# EAGLE board Layout (EAGLE 9.1.3)
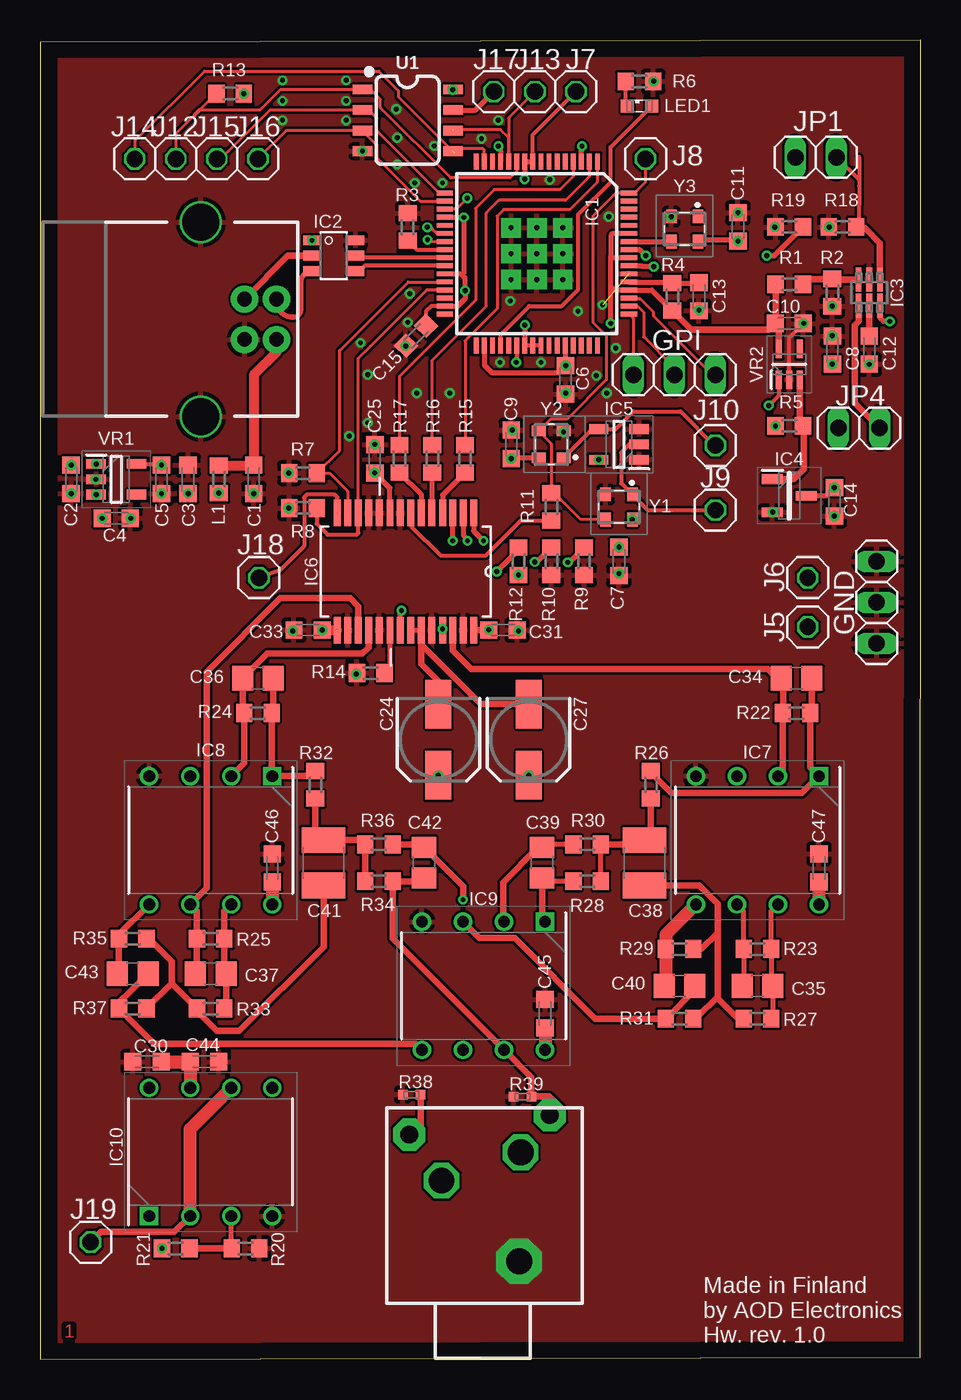
[diagram p0: board, top side]
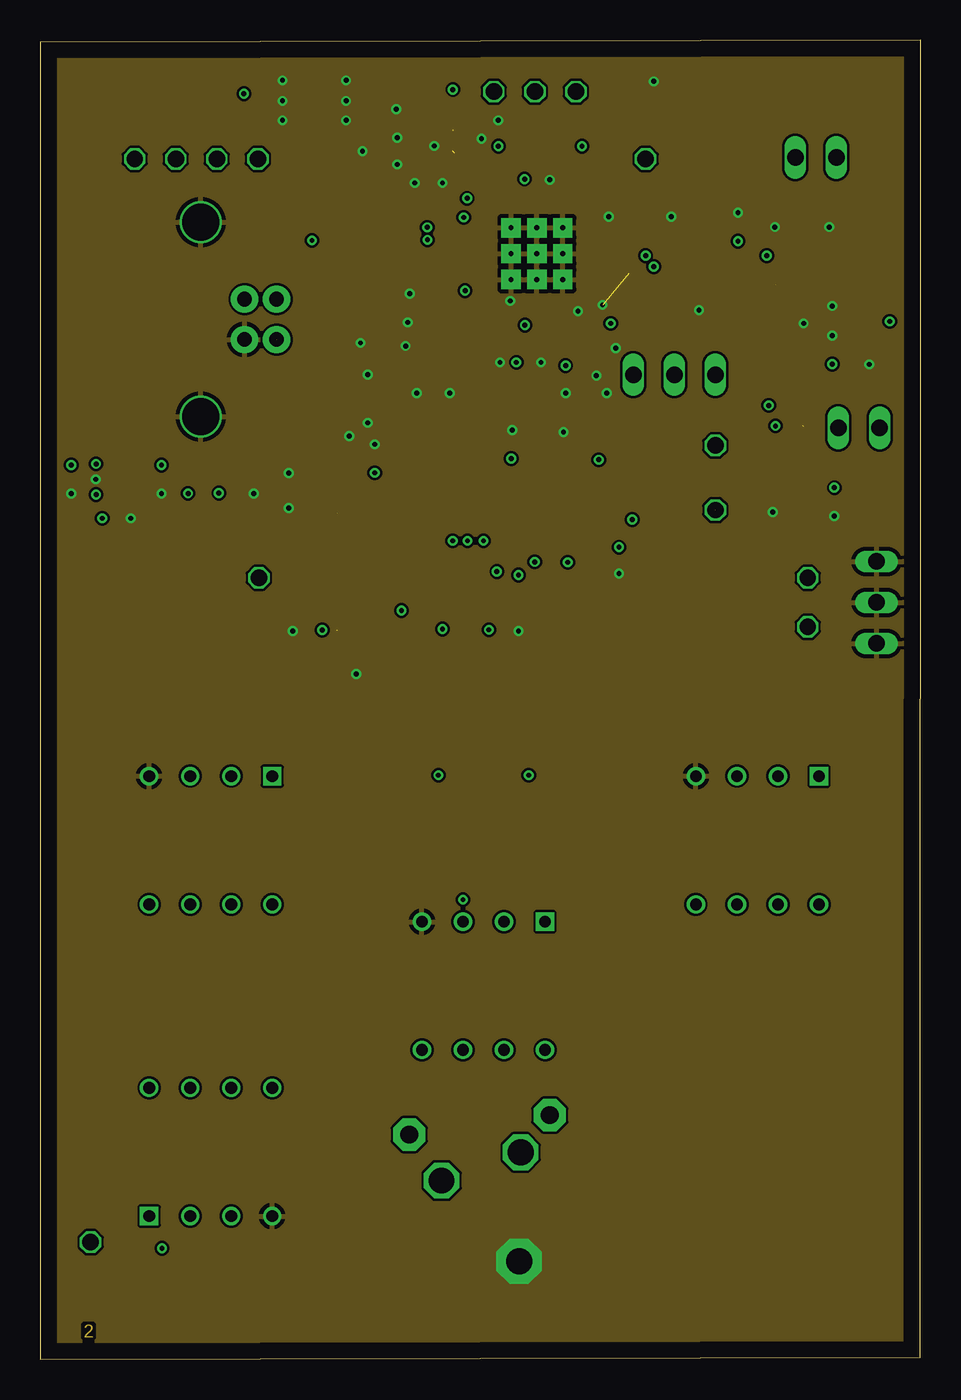
[diagram p1: board, inner layer Route2]
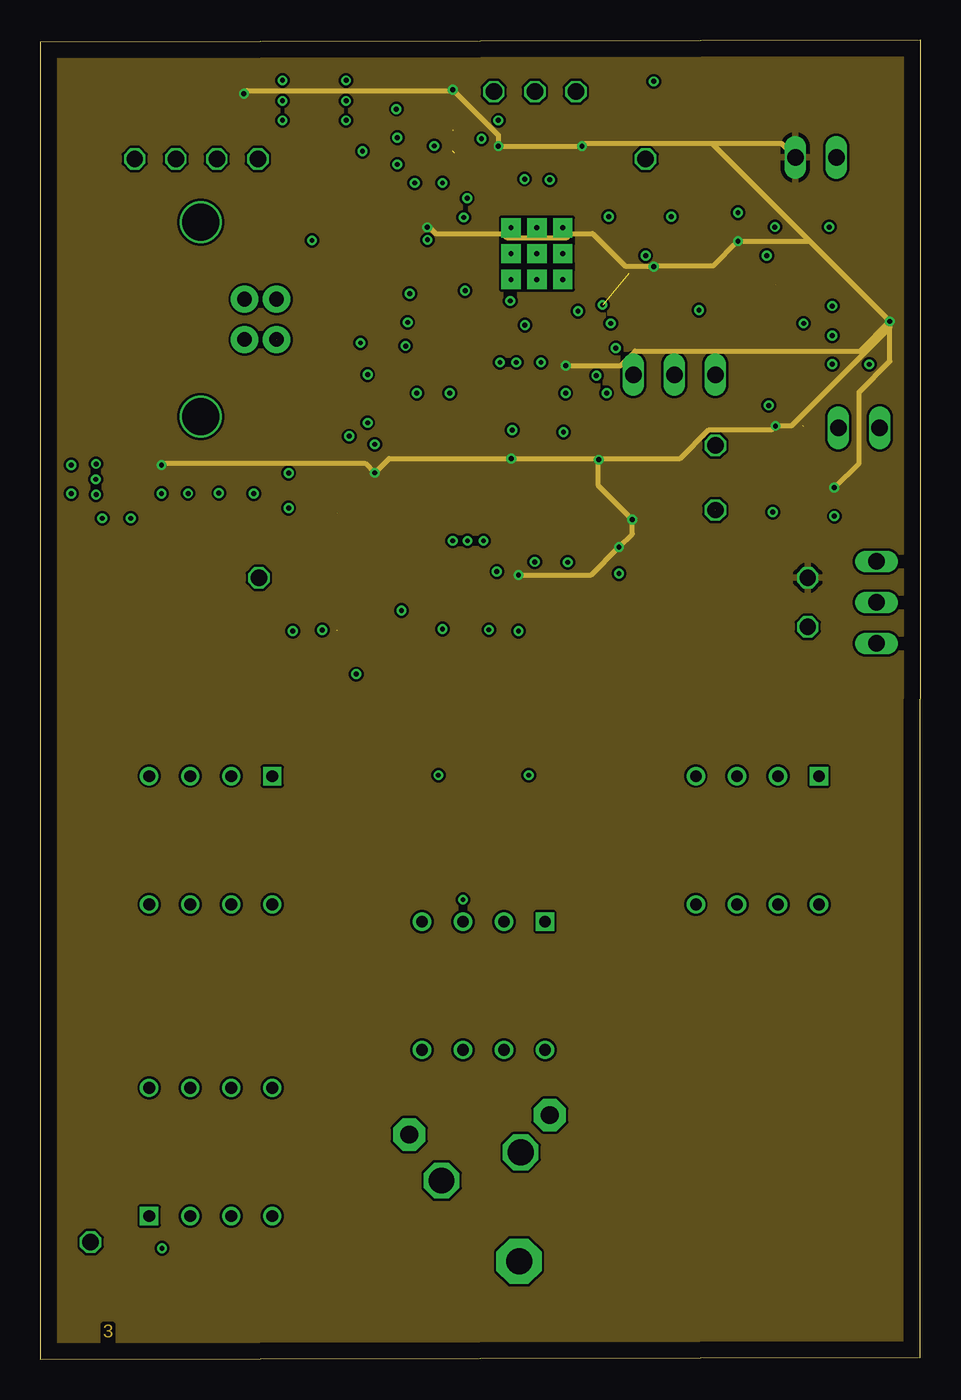
[diagram p2: board, inner layer Route15]
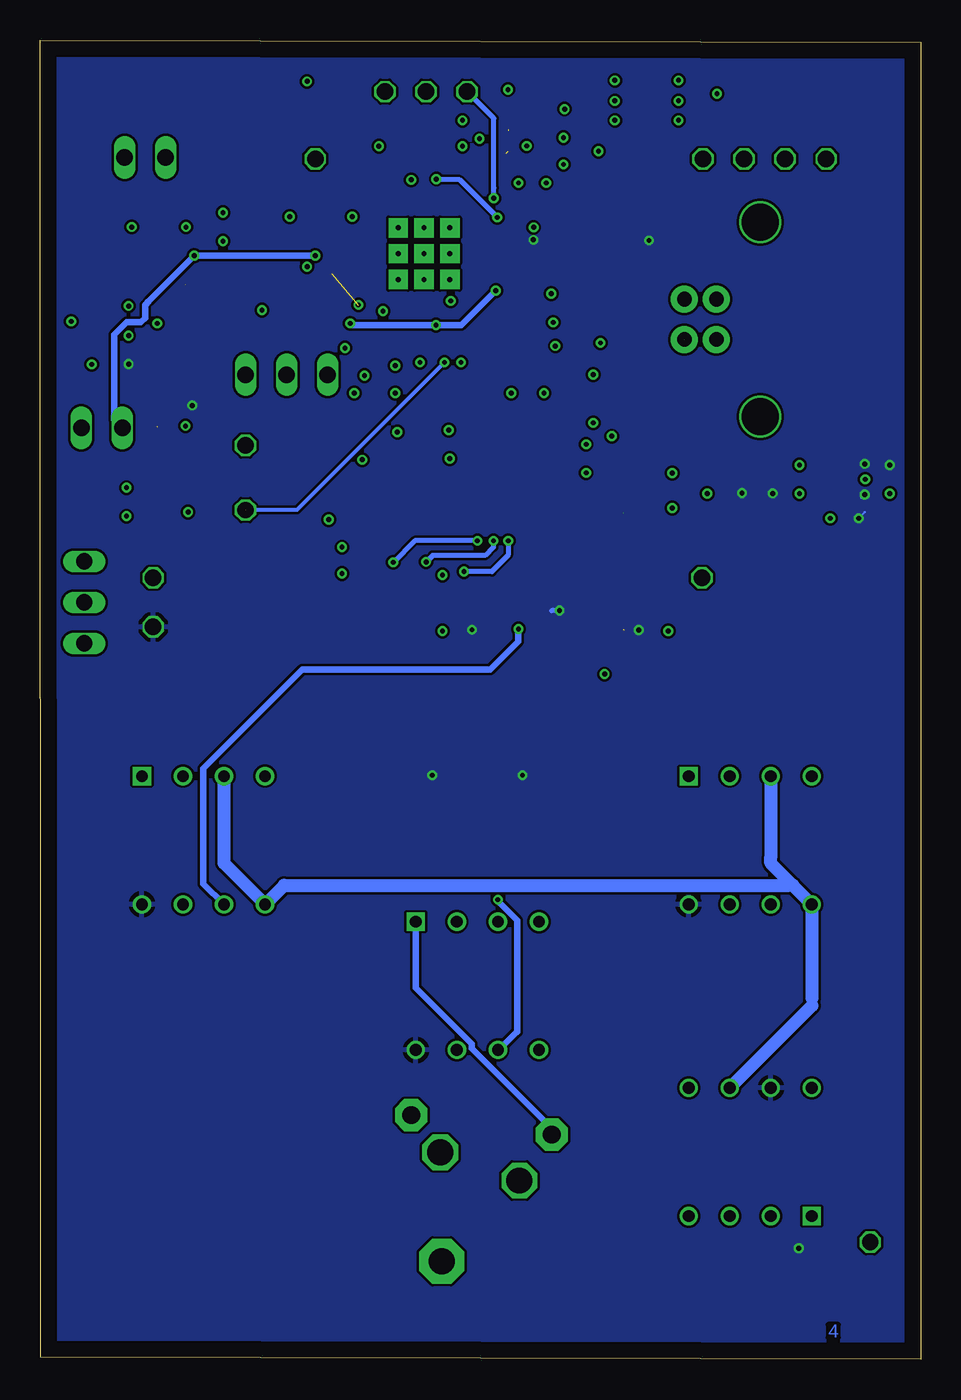
[diagram p3: board, bottom side, seen from below]

Size 54.48 x 81.66 mm. Coordinates in mm from the lower left corner, seen from the top.
Outline: 0,0 54.47,0.13 54.48,81.66 0,81.53 0,0
Copper layers (1+2*15+16): Top 0.035mm / dielectric 1.5mm / Route2 0.035mm / dielectric 0.15mm / Route15 0.035mm / dielectric 0.2mm / Bottom 0.035mm
Design rules "default *": minimum track width 6mil, minimum drill 0.2mm, track to track 6mil, track to pad 6mil, pad to pad 6mil, via to via 6mil, smd to smd 6mil, copper to edge 40mil, drill to drill 6mil, minimum pad ring 6mil, minimum via ring 6mil, stop-mask expansion 4mil, vias tented up to drill 20mil, thermal gap 10mil

## Footprints (pad centres in the part's own frame; a part is rotated, then mirrored left to right if it is on the bottom)
C0603K = smd 1.05 x 1.08: 1 -0.875,0; 2 0.875,0
SANYO-OSCON_SMD_B6 = smd 3 x 1.6: + 2.2,0; - -2.2,0
C0805 = smd 1.3 x 1.5: 1 -0.95,0; 2 0.95,0
C1210 = smd 1.6 x 2.7: 1 -1.4,0; 2 1.4,0
1X03 = drill 1.016 long: 1 -2.54,0; 2 0,0; 3 2.54,0
TQFP64 = smd 1 x 0.3: 1 -5.7,3.75; 2 -5.7,3.25; 3 -5.7,2.75; 4 -5.7,2.25; 5 -5.7,1.75; 6 -5.7,1.25; 7 -5.7,0.75; 8 -5.7,0.25; 9 -5.7,-0.25; 10 -5.7,-0.75; 11 -5.7,-1.25; 12 -5.7,-1.75; 13 -5.7,-2.25; 14 -5.7,-2.75; 15 -5.7,-3.25; 16 -5.7,-3.75; 33 5.7,-3.75; 34 5.7,-3.25; 35 5.7,-2.75; 36 5.7,-2.25; 37 5.7,-1.75; 38 5.7,-1.25; 39 5.7,-0.75; 40 5.7,-0.25; 41 5.7,0.25; 42 5.7,0.75; 43 5.7,1.25; 44 5.7,1.75; 45 5.7,2.25; 46 5.7,2.75; 47 5.7,3.25; 48 5.7,3.75 | smd 0.3 x 1: 17 -3.75,-5.7; 18 -3.25,-5.7; 19 -2.75,-5.7; 20 -2.25,-5.7; 21 -1.75,-5.7; 22 -1.25,-5.7; 23 -0.75,-5.7; 24 -0.25,-5.7; 25 0.25,-5.7; 26 0.75,-5.7; 27 1.25,-5.7; 28 1.75,-5.7; 29 2.25,-5.7; 30 2.75,-5.7; 31 3.25,-5.7; 32 3.75,-5.7; 49 3.75,5.7; 50 3.25,5.7; 51 2.75,5.7; 52 2.25,5.7; 53 1.75,5.7; 54 1.25,5.7; 55 0.75,5.7; 56 0.25,5.7; 57 -0.25,5.7; 58 -0.75,5.7; 59 -1.25,5.7; 60 -1.75,5.7; 61 -2.25,5.7; 62 -2.75,5.7; 63 -3.25,5.7; 64 -3.75,5.7 | drill 0.3 pad 1.2 square: GND1 -1.6,1.6; GND2 0,1.6; GND3 1.6,1.6; GND4 1.6,0; GND5 1.6,-1.6; GND6 0,-1.6; GND7 -1.6,-1.6; GND8 -1.6,0; GND9 0,0
SOT23-6 = smd 0.6 x 1.05: 1 -0.95,-1.35; 2 0,-1.35; 3 0.95,-1.35; 4 0.95,1.35; 5 0,1.35; 6 -0.95,1.35
SOT65P210X110-6N = smd 1.473 x 0.356: 1 -0.813,0.66; 2 -0.813,0; 3 -0.813,-0.66; 4 0.813,-0.66; 5 0.813,0; 6 0.813,0.66
SOT103P237X112-3N = smd 1.3 x 0.6: 1 -1.05,1.03; 2 -1.05,-1.03; 3 1.05,0
SOT95P280X145-5N = smd 1.2 x 0.6: 1 -1.25,0.95; 2 -1.25,0; 3 -1.25,-0.95; 4 1.25,-0.95; 5 1.25,0.95
SOP65P780X200-28N = smd 1.651 x 0.432: 1 -3.632,4.216; 2 -3.632,3.581; 3 -3.632,2.921; 4 -3.632,2.286; 5 -3.632,1.626; 6 -3.632,0.965; 7 -3.632,0.33; 8 -3.632,-0.33; 9 -3.632,-0.965; 10 -3.632,-1.626; 11 -3.632,-2.286; 12 -3.632,-2.921; 13 -3.632,-3.581; 14 -3.632,-4.216; 15 3.632,-4.216; 16 3.632,-3.581; 17 3.632,-2.921; 18 3.632,-2.286; 19 3.632,-1.626; 20 3.632,-0.965; 21 3.632,-0.33; 22 3.632,0.33; 23 3.632,0.965; 24 3.632,1.626; 25 3.632,2.286; 26 3.632,2.921; 27 3.632,3.581; 28 3.632,4.216
DIP794W53P254L959H508Q8N = drill 0.73 pad 1.13 square: 1 -3.97,3.81 | drill 0.73 pad 1.13: 2 -3.97,1.27; 3 -3.97,-1.27; 4 -3.97,-3.81; 5 3.97,-3.81; 6 3.97,-1.27; 7 3.97,1.27; 8 3.97,3.81
USB-B-PTH = drill 0.914 pad 1.676: D+ 4,1.25; D- 5.981,1.25; GND 4,-1.25; VBUS 5.981,-1.25 | drill 2.286: SHLD1 1.282,-6.02; SHLD2 1.282,6.02
1X01 = drill 1.016 octagon: 1 0,0
1X02 = drill 1.016 long: 1 -1.27,0; 2 1.27,0
R0603 = smd 1 x 1.1: 1 -0.85,0; 2 0.85,0
SML0603 = smd 0.8 x 0.8: A 0.75,0; C -0.75,0
CT/CN0402 = smd 0.6 x 0.6: 1 -0.55,0; 2 0.55,0
SO08 = smd 0.6 x 1.2: 1 -1.905,-2.8; 2 -0.635,-2.8; 3 0.635,-2.8; 4 1.905,-2.8; 5 1.905,2.8; 6 0.635,2.8; 7 -0.635,2.8; 8 -1.905,2.8
SJ3505 = drill 1.6 pad 2.8 octagon: 1 2.5,-2.2 | drill 1.1 pad 2 octagon: 2 11.55,-4.1; 5 10.35,4.6 | drill 1.6 pad 2.2 octagon: 3 9.25,-2.3; 4 7.5,2.6
SOT65P210X110-5N = smd 1.15 x 0.4: 1 -0.95,0.65; 2 -0.95,0; 3 -0.95,-0.65; 4 0.95,-0.65; 5 0.95,0.65
DSC1001DL50250000T = smd 0.85 x 0.65: 1 -0.775,0.825; 2 -0.775,-0.825; 3 0.775,-0.825; 4 0.775,0.825

## Placement (x,y rotation side)
C1  100n  [C0603K]  13.21,54.48 270 top
C2  100n  [C0603K]  1.91,54.48 270 top
C3  10u  [C0603K]  9.14,54.48 90 top
C4  1u  [C0603K]  4.7,52.07 0 top
C5  1u  [C0603K]  7.49,54.48 270 top
C6  10n  [C0603K]  32.51,60.64 270 top
C7  10n  [C0603K]  35.81,49.4 270 top
C8  1u  [C0603K]  49.02,62.48 90 top
C9  10n  [C0603K]  29.15,56.64 90 top
C10  1u  [C0603K]  46.35,64.14 0 top
C11  10n  [C0603K]  43.18,70.1 90 top
C12  2n  [C0603K]  51.31,62.48 270 top
C13  100n  [C0603K]  40.77,65.79 270 top
C14  100n  [C0603K]  49.15,53.09 270 top
C15  100n  [C0603K]  23.24,63.37 225 top
C24  [SANYO-OSCON_SMD_B6]  24.64,38.35 270 top
C25  100n  [C0603K]  20.7,55.75 90 top
C27  [SANYO-OSCON_SMD_B6]  30.23,38.35 270 top
C30  100n  [C0603K]  6.6,18.41 180 top
C31  100n  [C0603K]  28.64,45.15 0 top
C33  100n  [C0603K]  16.57,45.15 180 top
C34  2700p  [C0805]  46.8,42.16 180 top
C35  2700p  [C0805]  44.39,23.11 180 top
C36  2700p  [C0805]  13.46,42.16 180 top
C37  2700p  [C0805]  10.54,23.88 180 top
C38  27000p  [C1210]  37.4,30.73 270 top
C39  8200p  [C0805]  31.05,30.73 90 top
C40  8200p  [C0805]  39.56,23.11 180 top
C41  27000p  [C1210]  17.53,30.73 270 top
C42  8200p  [C0805]  23.75,30.73 90 top
C43  8200p  [C0805]  5.71,23.88 180 top
C44  100n  [C0603K]  10.16,18.41 0 top
C45  100n  [C0603K]  31.24,21.4 90 top
C46  100n  [C0603K]  14.35,30.42 90 top
C47  100n  [C0603K]  48.2,30.42 90 top
GND  [1X03]  51.77,46.86 90 top
GPI  [1X03]  39.24,60.96 0 top
IC1  XHRA-2HPA  [TQFP64]  30.73,68.45 270 top
IC2  STF202-22T1G  [SOT23-6]  18.16,68.33 270 top
IC3  ADM1085AKSZ-REEL7  [SOT65P210X110-6N]  51.31,66.04 270 top
IC4  STM1061N38WX6F  [SOT103P237X112-3N]  46.35,53.47 0 top
IC5  SN74LVC1G06  [SOT95P280X145-5N]  35.81,56.64 180 top
IC6  PCM1795DB  [SOP65P780X200-28N]  22.61,48.77 270 top
IC7  LME49720NA_NOPB  [DIP794W53P254L959H508Q8N]  44.39,32.13 270 top
IC8  LME49720NA_NOPB  [DIP794W53P254L959H508Q8N]  10.54,32.13 270 top
IC9  LME49720NA_NOPB  [DIP794W53P254L959H508Q8N]  27.43,23.11 270 top
IC10  TLE2141ACP  [DIP794W53P254L959H508Q8N]  10.54,12.83 90 top
J1  USB_B_PTH  [USB-B-PTH]  8.64,64.39 0 top
J5  [1X01]  47.5,45.34 90 top
J6  [1X01]  47.5,48.39 90 top
J7  [1X01]  33.15,78.49 0 top
J8  [1X01]  37.47,74.32 0 top
J9  [1X01]  41.78,52.58 180 top
J10  [1X01]  41.78,56.58 0 top
J12  [1X01]  8.38,74.32 90 top
J13  [1X01]  30.61,78.49 0 top
J14  [1X01]  5.84,74.32 0 top
J15  [1X01]  10.92,74.32 90 top
J16  [1X01]  13.46,74.32 90 top
J17  [1X01]  28.07,78.49 0 top
J18  [1X01]  13.53,48.39 180 top
J19  [1X01]  3.11,7.24 0 top
JP1  [1X02]  48.01,74.42 0 top
JP4  [1X02]  50.67,57.66 180 top
L1  BLM18PG221SN1D  [R0603]  11.05,54.48 270 top
LED1  [SML0603]  37.08,77.6 0 top
R1  4k  [R0603]  46.35,66.55 180 top
R2  10k  [R0603]  49.02,66.04 90 top
R3  43.2  [R0603]  22.73,70.1 270 top
R4  4.7  [R0603]  39.12,65.79 270 top
R5  10k  [R0603]  46.35,57.78 180 top
R6  5k  [R0603]  37.08,79.12 180 top
R7  2.2K  [R0603]  16.26,54.86 180 top
R8  2.2K  [R0603]  16.26,52.7 180 top
R9  1k  [R0603]  33.66,49.4 90 top
R10  1k  [R0603]  31.62,49.4 90 top
R11  10  [R0603]  31.62,52.77 90 top
R12  1k  [R0603]  29.59,49.4 90 top
R13  10k  [R0603]  11.75,78.36 180 top
R14  10k  [R0603]  20.45,42.48 0 top
R15  27  [R0603]  26.29,55.75 270 top
R16  27  [R0603]  24.26,55.75 270 top
R17  27  [R0603]  22.23,55.75 270 top
R18  1k  [R0603]  49.66,70.1 180 top
R19  1k  [R0603]  46.35,70.1 180 top
R20  10k  [R0603]  12.7,6.86 0 top
R21  10k  [R0603]  8.38,6.86 0 top
R22  820  [R0603]  46.8,40 180 top
R23  820  [R0603]  44.39,25.4 180 top
R24  820  [R0603]  13.46,40 180 top
R25  820  [R0603]  10.54,26.04 180 top
R26  220  [R0603]  37.78,35.56 90 top
R27  220  [R0603]  44.39,21.08 0 top
R28  200  [R0603]  33.85,29.59 0 top
R29  200  [R0603]  39.56,25.4 180 top
R30  180  [R0603]  33.85,31.88 180 top
R31  180  [R0603]  39.56,21.08 180 top
R32  220  [R0603]  17.02,35.56 90 top
R33  220  [R0603]  10.54,21.72 0 top
R34  200  [R0603]  20.95,29.59 180 top
R35  200  [R0603]  5.71,26.04 180 top
R36  180  [R0603]  20.95,31.88 0 top
R37  180  [R0603]  5.71,21.72 180 top
R38  VARISTORCN0402  [CT/CN0402]  22.99,16.38 180 top
R39  VARISTORCN0402  [CT/CN0402]  29.84,16.26 180 top
U1  S25FL132K  [SO08]  22.73,76.71 270 top
U$1  SJ3505  [SJ3505]  27.43,3.56 90 top
VR1  LP5907MFX-3.3_NOPB  [SOT95P280X145-5N]  4.7,54.48 0 top
VR2  MIC5365-1.0YC5-TR  [SOT65P210X110-5N]  46.35,61.59 90 top
Y1  DSC1001CL2-022.5972  [DSC1001DL50250000T]  35.81,52.77 270 top
Y2  DSC1001BI1-024.5760  [DSC1001DL50250000T]  31.62,56.64 180 top
Y3  DSC1001BC1-024.0000  [DSC1001DL50250000T]  39.88,69.98 270 top

## Library data of the parts
C1 C2 C13-C15 C25 C30 C31 C33 C44-C47 = resistor; MPN: A104M15X7RF5TAA; OC_NEWARK: 74AC7050
C3-C12 R1-R37 = resistor; OC_NEWARK: unknown
C24 C27 = rcl; OC_NEWARK: unknown; SPICEPREFIX: C
C34-C43 = rcl; SPICEPREFIX: C
GND GPI J5-J10 J12-J19 = pinhead
IC1 = pavouk; OC_NEWARK: unknown
IC2 = stf202_10; MF: ON SEMICONDUCTOR; MPN: STF202-22T1G; OC_FARNELL: 1651958; OC_NEWARK: 45J2271
IC3 = ADM1085AKSZ-REEL7; ARROW_PART_NUMBER: ADM1085AKSZ-REEL7; ARROW_PRICE/STOCK: https://www.arrow.com/en/products/adm1085aksz-reel7/analog-devices; DESCRIPTION: Analog Devices ADM1085AKSZ-REEL7, Voltage Supervisor, 0.6 22 V, 6-Pin SC-70; HEIGHT: mm; MANUFACTURER_NAME: Analog Devices; MANUFACTURER_PART_NUMBER: ADM1085AKSZ-REEL7; OC_NEWARK: unknown; RS_PART_NUMBER: 7427705P; RS_PRICE/STOCK: http://uk.rs-online.com/web/p/products/7427705P
IC4 = STM1061N38WX6F; ALLIED_NUMBER: 70390901; ALLIED_PRICE/STOCK: http://www.alliedelec.com/stmicroelectronics-stm1061n38wx6f/70390901/; ARROW_PART_NUMBER: STM1061N38WX6F; ARROW_PRICE/STOCK: https://www.arrow.com/en/products/stm1061n38wx6f/stmicroelectronics; DESCRIPTION: STM1061N38WX6F, Voltage Detector 3.724V Low Power Voltage Detector 3-Pin SOT-23; HEIGHT: 1.12mm; MANUFACTURER_NAME: STMicroelectronics; MANUFACTURER_PART_NUMBER: STM1061N38WX6F; OC_NEWARK: unknown; RS_PART_NUMBER: 6864800; RS_PRICE/STOCK: http://uk.rs-online.com/web/p/voltage-supervisors/6864800/?source=DS
IC5 = SN74LVC1G17QDBVRQ1; ARROW_PART_NUMBER: SN74LVC1G17QDBVRQ1; ARROW_PRICE/STOCK: https://www.arrow.com/en/products/sn74lvc1g17qdbvrq1/texas-instruments; DESCRIPTION: Automotive Catalog Single Schmitt-Trigger Buffer; HEIGHT: 1.45mm; MANUFACTURER_NAME: Texas Instruments; MANUFACTURER_PART_NUMBER: SN74LVC1G17QDBVRQ1; OC_NEWARK: unknown
IC6 = PCM1795DB; ARROW_PART_NUMBER: PCM1795DB; ARROW_PRICE-STOCK: https://www.arrow.com/en/products/pcm1795db/texas-instruments; DESCRIPTION: 32-Bit, 192-kHz Sampling, Advanced Segment Stereo Audio Digital-to-Analog Converter; HEIGHT: mm; MANUFACTURER_NAME: Texas Instruments; MANUFACTURER_PART_NUMBER: PCM1795DB; OC_NEWARK: unknown; RS_PART_NUMBER: 8143710P; RS_PRICE-STOCK: http://uk.rs-online.com/web/p/products/8143710P
IC7-IC9 = LME49720NA_NOPB; ARROW_PART_NUMBER: LME49720NA/NOPB; ARROW_PRICE-STOCK: https://www.arrow.com/en/products/lme49720nanopb/texas-instruments; DESCRIPTION: OP Amp Dual GP 17V PDIP8 Texas Instruments LME49720NA/NOPB, Dual Audio Op Amp, 55MHz Rail-Rail, 8-Pin PDIP; HEIGHT: 5.08mm; MANUFACTURER_NAME: Texas Instruments; MANUFACTURER_PART_NUMBER: LME49720NA/NOPB; OC_NEWARK: unknown; RS_PART_NUMBER: 7616217P; RS_PRICE-STOCK: http://uk.rs-online.com/web/p/products/7616217P
IC10 = TLE2141ACP; ARROW_PART_NUMBER: TLE2141ACP; ARROW_PRICE-STOCK: https://www.arrow.com/en/products/tle2141acp/texas-instruments; DESCRIPTION: Excalibur Low-Noise High-Speed Precision Operational Amplifier; HEIGHT: 5.08mm; MANUFACTURER_NAME: Texas Instruments; MANUFACTURER_PART_NUMBER: TLE2141ACP; OC_NEWARK: unknown; RS_PART_NUMBER: 6612003P; RS_PRICE-STOCK: http://uk.rs-online.com/web/p/products/6612003P
J1 = SparkFun-Connectors; OC_NEWARK: unknown; PROD_ID: CONN-08278; SF_ID: PRT-00139
JP1 JP4 = pinhead; OC_NEWARK: unknown
L1 = eagle-ltspice; OC_NEWARK: unknown; SPICEMODEL: NONE; SPICEPREFIX: R
LED1 = led; OC_NEWARK: unknown
R38 R39 = varistor
U1 = SparkFun-IC-Memory; OC_NEWARK: unknown; PROD_ID: IC-12455
U$1 = bardiir
VR1 = LP5907MFX-3.3_NOPB; ARROW_PART_NUMBER: LP5907MFX-3.3/NOPB; ARROW_PRICE/STOCK: https://www.arrow.com/en/products/lp5907mfx-3.3nopb/texas-instruments; DESCRIPTION: TEXAS INSTRUMENTS - LP5907MFX-3.3/NOPB - LDO, FIXED, 3.3V, 0.25A, SOT-23-5; HEIGHT: 1.45mm; MANUFACTURER_NAME: Texas Instruments; MANUFACTURER_PART_NUMBER: LP5907MFX-3.3/NOPB; OC_NEWARK: unknown
VR2 = MIC5365-1.8YC5-TR; ARROW_PART_NUMBER: MIC5365-1.8YC5-TR; ARROW_PRICE/STOCK: http://uk.rs-online.com/web/p/products/1655152; DESCRIPTION: IC REG LINEAR 1.8V 150MA SC70-5; HEIGHT: 1.1mm; MANUFACTURER_NAME: Microchip; MANUFACTURER_PART_NUMBER: MIC5365-1.8YC5-TR; OC_NEWARK: unknown; RS_PART_NUMBER: 1655152; RS_PRICE/STOCK: http://uk.rs-online.com/web/p/products/1655152
Y1-Y3 = DSC1001DL2-049.5000T; ARROW_PART_NUMBER: DSC1001DL2-049.5000T; DESCRIPTION: Standard Clock Oscillators Oscillator Low Power -40C-105C 25ppm; HEIGHT: 0mm; MANUFACTURER_NAME: Microchip; MANUFACTURER_PART_NUMBER: DSC1001DL2-049.5000T; OC_NEWARK: unknown

## Nets
1V: C10.1 C15.1 IC1.9 IC1.10 IC1.20 IC1.27 IC1.31 IC1.39 IC1.40 IC1.41 IC1.52 IC1.56 IC1.59 J7.1 R1.2 R4.2 VR2.5
3.3V: C5.1 C6.1 C7.1 C9.1 C11.1 C14.1 C25.1 IC1.3 IC1.13 IC1.22 IC1.34 IC1.44 IC1.55 IC3.6 IC4.3 IC5.5 IC6.9 J6.1 JP1.1 R5.2 R12.1 R13.1 U1.8 VR1.5 Y1.4 Y2.4 Y3.4
5V: C2.1 C3.1 C4.1 C8.1 C24.+ C27.+ C30.1 C31.1 C33.1 C44.1 C45.1 C46.1 C47.1 IC1.23 IC2.1 IC6.15 IC6.21 IC6.28 IC7.8 IC8.8 IC9.8 IC10.7 J5.1 L1.2 R21.1 VR1.1 VR1.3 VR2.1
AUDIO_LEFT: C39.1 IC9.1 R28.1 R38.1 U$1.5
AUDIO_RIGHT: C42.1 IC9.7 R34.1 R39.1 U$1.2
BCK: IC1.4 R17.1
CLK: IC1.58 Y3.3
D0: IC1.15 J14.1 U1.5
D1: IC1.17 J15.1 U1.2
D2: IC1.18 J16.1 U1.3
D3: IC1.19 J17.1 U1.7
DAC_RST: IC6.14 J18.1
DATA: IC1.2 R16.1
DM_I: IC2.3 J1.D-
DP_I: IC2.2 J1.D+
GND: C1.2 C2.2 C3.2 C4.2 C5.2 C6.2 C7.2 C8.2 C9.2 C10.2 C11.2 C12.2 C13.2 C14.2 C15.2 C25.2 C30.2 C31.2 C33.2 C44.2 C45.2 C46.2 C47.2 GND.1 GND.2 GND.3 IC1.54 IC1.GND1 IC1.GND2 IC1.GND3 IC1.GND4 IC1.GND5 IC1.GND6 IC1.GND7 IC1.GND8 IC1.GND9 IC2.6 IC3.2 IC4.2 IC5.1 IC5.3 IC6.8 IC6.10 IC6.11 IC6.16 IC6.19 IC6.24 IC6.27 IC7.4 IC8.4 IC9.4 IC10.4 J1.GND J1.SHLD1 J1.SHLD2 R2.1 R3.1 R6.1 R7.2 R8.2 R9.1 R10.1 R14.1 R18.2 R19.2 R20.2 R38.2 R39.2 U1.4 U$1.1 VR1.2 VR2.2 Y1.2 Y2.2 Y3.2
GPI_0: IC1.43
GPI_1: IC1.45
GPI_2: IC1.47
GPI_3: GPI.1 IC1.49
GPI_4: GPI.2 IC1.50
GPI_5: GPI.3 IC1.51
GPI_6: IC1.46
GPI_7: IC1.48
IL+: C35.2 IC6.25 IC7.6 R23.2
IL+V: C35.1 IC7.7 R23.1 R27.2
IL-: C34.2 IC6.26 IC7.2 R22.2
IL-V: C34.1 IC7.1 R22.1 R26.2
INPUT_B+: C43.1 IC9.5 R37.2
INPUT_B-: C42.2 IC9.6 R36.2
IR+: C37.2 IC6.17 IC8.6 R25.2
IR+V: C37.1 IC8.7 R25.1 R33.2
IR-: C36.2 IC6.18 IC8.2 R24.2
IR-V: C36.1 IC8.1 R24.1 R32.2
LRCK: IC1.1 R15.1
MCLK: IC1.64 J8.1 R11.2 Y1.3 Y2.3
MCLK_SEL: IC1.38 IC5.2 J9.1 Y1.1
N$2: C1.1 J1.VBUS L1.1
N$4: C12.1 IC3.5
N$5: IC3.3 R1.1 R2.2
N$6: IC1.24 R3.2
N$7: C13.1 IC1.53 R4.1
N$8: IC4.1 R5.1 VR2.3
N$11: Y3.1
N$13: IC1.36 LED1.A
N$14: LED1.C R6.2
N$16: IC6.1 R9.2
N$18: IC6.7 R11.1
N$19: IC6.2 R10.2
N$20: IC6.3 R12.2
N$21: IC6.20 R14.2
N$22: IC6.4 R15.2
N$23: IC6.6 R17.2
N$24: IC6.5 R16.2
N$25: IC3.1 JP1.2 R18.1
N$29: IC3.4 JP4.1
N$30: C24.- C27.- IC6.22 IC6.23
N$35: IC10.3 R20.1 R21.2
N$39: C38.1 R26.1 R28.2 R30.1
N$40: C38.2 R27.1 R29.1 R31.1
N$41: C40.1 IC9.3 R31.2
N$42: C39.2 IC9.2 R30.2
N$45: C41.1 R32.1 R34.2 R36.1
N$46: C41.2 R33.1 R35.1 R37.1
N_MCLK_SEL: IC5.4 J10.1 Y2.1
RST_N: IC1.57 JP4.2 R19.1
SCLK: IC1.29 IC6.12 R8.1
SDATA: IC1.28 IC6.13 R7.1
SPI_CLK: IC1.12 J13.1 U1.6
SPI_CS: IC1.11 J12.1 R13.2 U1.1
USBDM: IC1.26 IC2.4
USBDP: IC1.25 IC2.5
VGND: C40.2 C43.2 IC7.3 IC7.5 IC8.3 IC8.5 IC10.2 IC10.6 J19.1 R29.2 R35.2

## Tracks (layer width: path | path; a pad name or v marks a point on that pad's centre or on a via)
1V  (via drill 0.3)  (1 unrouted)
  Top 0.254: 45.7,63.91 C10.1 | IC1.39 IC1.40 IC1.41 | IC1.9 30.48,75.82 J7.1 | IC1.31 24.18,65.2 23.86,64.88 C15.1
  Top 0.305: IC1.10 IC1.9 | 29.97,74.14 IC1.10 | 26.1,67.12 26.02,67.2 IC1.27 | 26.1,67.12 26.29,66.93 v26.29,66.17 26.29,65.66 25.83,65.2 IC1.31 | IC1.59 35.41,69.7 35.31,69.6 35.31,68.33 | 35.31,68.33 35.43,68.2 35.44,68.2 IC1.56 | 35.31,66.42 35.31,68.33 | 35.31,66.42 35.52,66.2 IC1.52 37.85,66.2 R4.2 39.12,64.64 | v29.99,64.03 IC1.39 | v35.31,64.14 35.31,66.42 | IC1.20 v26.2,70.7 26.2,67.22 26.1,67.12 | IC1.10 29.98,73.09 v29.97,73.07
  Top 0.4: R4.2 40.3,63.75 45.1,63.75 C10.1
  Top 0.406: R1.2 45.51,64.16 C10.1 | VR2.5 45.7,63.91
  Bottom 0.305: 29.97,64.01 v29.99,64.03 | v26.2,70.7 28.52,73.03 29.97,73.03 v29.97,73.07
  Bottom 0.4: v26.29,66.17 28.43,64.03 v29.99,64.03 35.2,64.03 v35.31,64.14
3.3V  (via drill 0.3)
  Top 0.2: 28.53,74.93 v28.35,75.11 | IC1.22 24.53,69.7 24.43,69.8 24.28,69.95 24.21,70.02 23.95,70.02
  Top 0.254: VR1.5 7.42,55.43 C5.1 | v28.35,75.11 28.35,74.97 28.48,74.84
  Top 0.305: IC3.6 51.97,64.49 52.2,64.26 v52.58,64.26 | IC4.3 48.66,53.47 C14.1 | v43.18,69.23 43.08,69.33 40.96,69.33 40.83,69.2 Y3.4 | IC1.55 37.19,67.7 37.2,67.69 37.73,67.69 37.74,67.7 37.83,67.7 37.89,67.65 v37.97,67.65 | C9.1 29.2,55.82 Y2.4 | IC6.9 21.64,53.94 C25.1 | IC1.44 32.48,61.55 C6.1 32.08,61.09 27.94,61.09 27.48,61.54 IC1.34 | 28.48,74.84 IC1.13 | v28.35,75.11 | IC1.3 33.48,75.01 33.53,75.06 v33.53,75.11 | 23.95,70.02 v23.95,70.08
  Route15 0.305: C14.1 50.67,55.48 50.67,59.88 52.58,61.79 v52.58,64.26 | 47.61,69.23 v43.18,69.23 41.64,67.69 38.02,67.69 v37.97,67.65 37.93,67.69 36.2,67.69 34.18,69.7 32.84,69.7 32.59,69.45 28.88,69.45 28.62,69.7 24.46,69.7 24.08,70.08 v23.95,70.08 | v52.58,64.26 47.74,69.1 47.61,69.23 | 34.54,55.77 C9.1 21.59,55.77 C25.1 20.09,55.48 7.62,55.48 C5.1 | 34.54,55.77 39.61,55.77 41.38,57.54 45.26,57.54 v45.51,57.78 46.48,57.78 52.58,63.88 v52.58,64.26 | IC5.5 34.54,55.71 | 34.54,55.71 34.54,55.77 | 34.54,55.71 34.54,54.09 Y1.4 36.64,51.1 C7.1 34.09,48.55 R12.1 | v52.58,64.26 50.75,62.43 36.81,62.43 35.9,61.52 C6.1 | 41.55,75.29 33.7,75.29 v33.53,75.11 v28.35,75.11 28.35,75.79 U1.8 25.47,78.55 12.79,78.55 R13.1 | 41.55,75.29 45.87,75.29 JP1.1 | 41.55,75.29 47.61,69.23
  other vias: 49.15,53.96 29.15,55.77 34.56,55.69 36.64,51.99 35.81,50.28 29.59,48.55 20.7,54.88 7.49,55.36 32.51,61.52 25.53,78.61 12.6,78.36
  pour Route15: 0,0.25 54.61,0.25 54.61,28.19 54.61,81.53 0,81.53
5V  (via drill 0.3, 0.3 pad 0.4)  (1 unrouted)
  Top 0.152: IC1.23 25.01,69.18 24.09,69.18 v23.96,69.31
  Top 0.254: VR2.1 45.7,59.67 v45.09,59.05
  Top 0.305: v27.76,45.16 C31.1 | IC6.21 22.28,46.28 v22.35,46.36
  Top 0.406: C31.1 26.84,45.15 IC6.28
  Top 0.61: C33.1 18.34,45.15 18.35,45.14
  Top 0.813: C47.1 IC7.8 | C45.1 IC9.8 | C46.1 IC8.8 | IC10.7 9.29,16.81 C44.1 C30.1
  Bottom 0.152: L1.2 11.05,53.59 | C3.1 9.27,53.47 | C4.1 3.44,52.45 | VR1.3 3.64,53.34 3.68,53.34
  Bottom 0.305: R21.1 7.49,6.86 | C24.+ 24.64,36.2 | C27.+ 30.23,36.2 | v27.76,45.16 27.81,45.11 | v22.35,46.36 22.86,46.36
  other vias: 7.53,6.86 24.64,36.15 30.23,36.15 11.05,53.63 9.14,53.61 3.82,52.07 3.45,53.53 1.91,55.36 3.45,55.43 16.81,69.28 17.45,45.15 49.02,61.61
  pour Bottom: 0.76,0 54.1,0 54.1,13.33 54.1,81.66 0.76,81.66
AUDIO_LEFT
  Top 0.305: R28.1 31.24,29.59 C39.1
  Top 0.406: C39.1 31.05,27.27 IC9.1 | R38.1 23.54,14.23 U$1.5
  Bottom 0.406: IC9.1 31.24,22.99 27.78,19.52 27.78,19.24 22.83,14.29 U$1.5
AUDIO_RIGHT
  Top 0.4: 21.8,26.04 R34.1 23.56,29.59 C42.1
  Top 0.406: 21.8,26.04 IC9.7 30.39,17.45 R39.1 31.5,16.26 32.1,15.65 31.72,15.27 31.69,15.27 U$1.2
BCK
  Top 0.2: IC1.4 32.98,73.24 32.16,72.42 28.09,72.42 26.95,71.27 26.95,65.57 22.23,60.85 R17.1
CLK
  Top 0.305: IC1.58 Y3.3
D0  (1 unrouted)
  Top 0.152: U1.5 25.69,74.96 25.84,74.96
  Top 0.2: IC1.15 27.48,74.88 27.4,74.96 25.84,74.96 25.69,74.96 | J14.1 5.84,75.44 10.16,79.76 20.95,79.76 22.16,78.55 | 22.16,78.55 22.16,78.17 25.65,74.68 | 22.16,78.55
D1
  Top 0.2: 20.32,77.34 20.83,76.84 20.83,76.07 24.69,72.2 IC1.17 | U1.2 14.2,77.34 11.18,74.32 J15.1
  Top 0.254: 20.32,77.34 U1.2
D2
  Top 0.2: 24.49,71.7 25.02,71.7 | 25.02,71.7 IC1.18 | J16.1 15.21,76.07 U1.3 20.83,75.18 20.83,74.39 23.52,71.7 25.02,71.7
  Top 0.254: 20.12,76.07 U1.3
D3  (via drill 0.3)
  Top 0.2: v26.42,71.88 25.74,71.2 IC1.19
  Top 0.305: U1.7 26.92,77.34 J17.1
  Bottom 0.305: v26.42,71.88 26.42,72.52 26.42,76.84 J17.1
DAC_RST  (1 unrouted)
  Top 0.254: J18.1 14.82,48.83 16.33,50.34 16.33,53.37 16.49,53.53 18.22,53.53 18.39,53.36 IC6.14
DATA
  Top 0.2: R16.1 24.26,61.86 27.61,65.21 27.61,70.98 28.38,71.76 32.51,71.76 33.98,73.23 IC1.2
DM_I
  Top 0.305: IC2.3 arc90 16.13,66.69 16.13,65.02 arc-90 15.62,64.52 arc-90 14.62,65.52 J1.D-
DP_I
  Top 0.406: J1.D+ 15.32,68.33 IC2.2
GND  (via drill 0.3 pad 0.4)  (1 unrouted)
  Top 0.254: VR2.2 46.35,63.26 C10.2
  other vias: 22.03,77.41 22.1,75.63 24.89,72.83 22.1,73.98 23.18,72.83 18.92,79.18 14.99,79.18 18.92,76.71 14.99,76.71 28.35,76.71 35.18,70.74 33.27,64.9 22.86,65.98 22.61,62.74 20.7,56.64 29.21,57.53 32.38,57.4 35.81,48.64 29.59,45.08 19.56,42.42 13.21,53.59 15.37,52.7 15.37,54.86 7.49,53.59 1.91,53.59 5.59,52.07 39.05,70.74 43.18,70.99 45.47,70.1 48.83,70.1 49.02,65.21 47.24,64.14 49.02,63.37 40.77,64.96 51.31,61.59 49.15,52.2 19.94,74.8 24.38,75.12 15.62,45.08 45.34,52.45 37.97,79.12 3.43,54.48 22.73,64.2 20.26,60.96 20.26,57.98 19.81,62.93 19.11,57.15 25.34,59.82 30.99,61.72 28.45,61.72 32.51,59.82 27.3,75.56 31.52,73.03 29.08,65.53 34.8,65.28 35.62,62.61 34.42,60.9 35.05,59.82 23.3,59.82 18.92,77.91 14.99,77.91
  pour Route2: 0.25,82.04 63.12,82.04 63.12,0 0.25,0
  pour Top: 0.76,0.13 54.1,0.13 54.1,81.53 0.76,81.53
GPI_3
  Top 0.2: GPI.1 36.69,60.97 36.69,64.45 IC1.49
GPI_4
  Top 0.2: IC1.50 36.97,65.2 37.34,64.83 37.34,63.31 39.24,61.41 GPI.2
GPI_5
  Top 0.2: IC1.51 36.47,65.67 37.13,65.67 37.94,64.85 37.94,64.61 41.59,60.96 GPI.3
IL+  (via drill 0.3 pad 0.15)
  Top 0.2: IC6.25 v24.89,45.21
  Top 0.305: C35.2 43.54,23.21 R23.2 43.54,27.74 IC7.6
  Bottom 0.406: IC7.6 44.39,29.43 44.39,36.58 38.26,42.7 26.64,42.7 24.89,44.45 v24.89,45.21
IL+V
  Top 0.305: IC7.7 45.24,27.74 R23.1 45.24,23.21 C35.1 45.34,21.18 R27.2
IL-
  Top 0.305: 45.99,40.34 45.95,40.3 R22.2 | C34.2 45.85,41.91
  Top 0.4: C34.2 45.99,42.02 45.99,40.34 | R22.2 45.95,36.39 IC7.2
  Top 0.406: IC6.26 25.53,43.88 26.67,42.73 45.02,42.73 45.85,41.91
IL-V
  Top 0.4: C34.1 47.75,40.11 R22.1 47.65,36.65 IC7.1 48.17,36.1 47.12,35.05 39.05,35.05 37.78,36.32 R26.2
INPUT_B+
  Top 0.406: C43.1 5.77,22.98 5.56,22.77 4.87,22.08 R37.2 7.06,19.52 23.24,19.52 IC9.5
INPUT_B-  (via drill 0.3 pad 0.5)
  Top 0.4: R36.2 23.56,31.88 C42.2 26.16,29.27
  Top 0.406: 26.16,29.27 v26.16,28.45
  Bottom 0.406: IC9.6 26.1,19.14 24.99,20.26 24.96,20.26 24.96,27.18 26.16,28.39 v26.16,28.45
IR+
  Top 0.406: C37.2 9.69,23.98 R25.2 9.69,27.74 IC8.6 10.29,29.18 10.29,42.55 14.86,47.12 19.18,47.12 19.68,46.61 IC6.17
IR+V
  Top 0.406: IC8.7 11.39,27.74 R25.1 11.39,23.98 C37.1 11.49,21.82 R33.2
IR-
  Top 0.4: 16.76,43.69 14.04,43.69 C36.2 12.51,40.11 R24.2 12.61,36.9 IC8.2
  Top 0.406: IC6.18 20.32,44.07 19.94,43.69 16.76,43.69
IR-V
  Top 0.4: C36.1 14.41,40.11 R24.1 14.31,36.36 14.46,36.21 IC8.1 16.71,36.1 R32.2
LRCK
  Top 0.2: R15.1 26.29,63.06 28.27,65.04 28.27,70.78 28.67,71.18 32.07,71.18 32.77,71.18 34.48,72.9 34.48,72.96 34.48,73.28 IC1.1
MCLK
  Top 0.2: Y1.3 33.44,51.99 31.81,53.62 | IC1.64 35.63,72.2 34.2,70.78 34.2,64.2 35.04,63.37 35.04,60.65 32.61,58.21 31.59,58.21 Y2.3 31.62,56.69 R11.2 | 36.77,72.2 37.47,72.9 J8.1
  Top 0.254: 31.81,53.62 R11.2 | IC1.64 36.77,72.2
MCLK_SEL  (via drill 0.3)  (1 unrouted)
  Top 0.254: IC5.2 36.45,56.64 35.94,56.13 35.94,54.24 Y1.1 36.64,53.53 37.59,52.58 J9.1 | IC1.38 29.48,62 29.46,61.98 v29.46,61.72
  Bottom 0.254: v29.46,61.72 38.61,52.58 J9.1
N$2  (1 unrouted)
  Top 0.61: L1.1 13.18,55.33 C1.1 13.21,60.96 14.62,62.37 J1.VBUS
N$4
  Top 0.406: IC3.5 C12.1
N$5
  Top 0.406: IC3.3 49.06,66.85 R2.2 47.55,66.89 R1.1
N$6
  Top 0.254: R3.2 23.28,68.7 IC1.24
N$7
  Top 0.305: C13.1 40.74,66.64 R4.1 39.05,66.7 IC1.53
N$8  (1 unrouted)
  Top 0.254: 47.16,57.83 R5.1
  Top 0.4: IC4.1 46.62,54.5 47.24,55.12 47.24,57.75
  Top 0.406: VR2.3 47.01,57.98 47.16,57.83
N$13
  Top 0.254: IC1.36 28.48,63.45 30.25,65.21 32.29,65.21 33.29,66.21 33.29,70.89 35.29,72.89 35.29,75.06 LED1.A
N$14
  Top 0.254: LED1.C 36.23,77.7 R6.2
N$16  (via drill 0.3)
  Top 0.305: IC6.1 26.82,51.28 27.18,50.93 v27.43,50.67 | v32.64,49.34 32.74,49.34 R9.2
  Bottom 0.305: v27.43,50.67 31.3,50.67 v32.64,49.34
N$18
  Top 0.254: IC6.7 22.94,51.6 24.77,49.76 27.58,49.76 29.73,51.92 R11.1
N$19  (via drill 0.3)
  Top 0.305: IC6.2 26.19,51.03 26.54,50.67 v26.44,50.67 | R10.2 30.74,49.37 v30.61,49.37
  Bottom 0.305: v26.44,50.67 26.44,50.28 26.95,49.77 30.21,49.77 v30.61,49.37
N$20  (via drill 0.3)
  Top 0.305: R12.2 29.59,50.1 v28.26,48.77 | v25.53,50.67 IC6.3
  Bottom 0.305: v28.26,48.77 26.54,48.77 25.53,49.78 v25.53,50.67
N$21
  Top 0.305: IC6.20 21.64,42.68 R14.2
N$22
  Top 0.305: IC6.4 24.89,53.21 24.89,53.51 R15.2
N$23
  Top 0.305: R17.2 23.57,53.56 IC6.6
N$24
  Top 0.305: R16.2 24.23,54.88 IC6.5
N$25
  Top 0.254: 51.05,70.03 50.98,70.1 R18.1 50.66,70.26 50.67,72.64 | 50.69,74.44 50.67,72.64 | JP1.2 50.67,73.02 50.67,72.64
  Top 0.4: IC3.1 51.97,69.11 51.05,70.03
N$29
  Top 0.4: 50.65,64.26 50.42,64.03 50.42,59.19 JP4.1
  Top 0.406: 50.65,64.26 IC3.4
N$30
  Top 0.305: IC6.22 IC6.23
  Top 0.406: 24.65,41.68 24.65,41.97 23.57,43.05 IC6.23 23.57,44.25 23.76,44.06 27.27,40.55 C27.- | 24.65,41.68 24.64,41.67 | C24.- 24.64,41.67 | 24.64,41.67 24.65,41.68
N$35
  Top 0.305: R20.1 11.81,6.9 IC10.3
  Top 0.406: R21.2 R20.1
N$39
  Top 0.305: R28.2 R30.1
  Top 0.4: R26.1 37.78,32.26 37.91,32.13 C38.1
  Top 0.406: R30.1 37.15,31.88 C38.1
N$40
  Top 0.4: R27.1 43.19,21.08 41.92,22.35 41.88,22.39 40.7,21.21 40.7,21.08 | 41.92,26.92 41.92,26.4 40.92,25.4 R29.1
  Top 0.406: R31.1 40.7,21.08 | 41.92,22.35 41.92,26.92 41.92,28.19 40.78,29.33 C38.2
N$41
  Top 0.406: C40.1 40.51,22.86 38.73,21.08 R31.2 34.35,21.08 29.37,26.07 27.18,26.07 IC9.3
N$42
  Top 0.305: R30.2 31.24,31.88 C39.2
  Top 0.406: IC9.2 28.64,27.15 28.64,29.53 30.73,31.62 30.99,31.62 C39.2
N$45
  Top 0.4: R34.2 R36.1 19.85,32.13 C41.1 17.27,32.13 17.02,31.88 R32.1
N$46
  Top 0.4: 12.32,20.32 17.53,25.53 C41.2
  Top 0.406: R37.1 8.13,23.28 | R35.1 6.73,26.04 8.13,24.64 8.13,23.28 | 12.32,20.32 10.92,20.32 9.69,21.55 R33.1 8.13,23.28
N_MCLK_SEL
  Top 0.254: 41.78,56.52 39.62,58.67 36.7,58.67 35.62,57.59 IC5.4 34.17,57.59 Y2.1
  Top 0.406: J10.1 41.78,56.52 | 41.78,56.52
RST_N  (via drill 0.3)
  Top 0.305: IC1.57 37.09,68.7 v37.47,68.33 | v44.96,68.33 45.43,68.33 R19.1
  Bottom 0.254: 49.91,63.44 49.89,63.44 49.87,63.46
  Bottom 0.4: 47.78,65.5 v44.96,68.33 v37.47,68.33 | 49.91,63.44 49.91,58.17 JP4.2
  Bottom 0.406: 47.78,65.5 48.01,65.28 48.01,64.45 48.26,64.2 49.13,64.2 49.87,63.46
SCLK
  Top 0.2: IC1.29 23.91,66.2 20.45,62.74 19.68,61.98 IC6.12
  Top 0.254: R8.1 17.11,51.73 17.78,51.05 19.56,51.05 19.68,51.18 IC6.12
SDATA
  Top 0.2: IC6.13 19.02,53.75 17.91,54.86 R7.1 18.52,56.28 18.52,62.46 22.76,66.7 IC1.28
SPI_CLK  (1 unrouted)
  Top 0.152: 28.96,74.17 IC1.12
  Top 0.2: 25.53,76.14 28.47,76.14 28.98,75.62 28.98,74.3 28.98,76.86 J13.1
  Top 0.305: IC1.12 28.98,74.3
SPI_CS
  Top 0.2: IC1.11 29.48,73.55 29.08,73.15 25.4,73.15 21.05,77.5 21.05,78.01 20.51,78.55 20,78.55 U1.1 14.86,78.61 13.59,77.34 9.84,77.34 | 10.86,78.36 9.53,77.03 8.38,75.88 J12.1
  Top 0.254: 9.84,77.34 9.53,77.03 | R13.2 10.86,78.36
  Top 0.305: 19.81,78.61 U1.1
USBDM
  Top 0.254: IC1.26 20.08,67.7 19.75,67.38 IC2.4
USBDP
  Top 0.254: IC1.25 19.63,68.2 IC2.5
VGND
  Top 0.406: C43.2 4.87,23.98 R35.2 4.87,26.29 IC8.5 | 38.71,23.21 C40.2 | J19.1 3.75,7.87 8.29,7.87 IC10.2
  Top 0.8: IC10.2 9.27,14.26 IC10.6 | IC7.5 38.71,26.29 R29.2 38.71,23.21
  Bottom 0.4: 7.91,29.34 8.13,29.34
  Bottom 0.406: 6.73,21.88 6.73,22.35
  Bottom 0.8: IC8.3 9.27,31.11 9.27,30.7 7.91,29.34 IC8.5 6.73,22.35 | IC7.3 43.12,30.7 IC7.5 39.4,29.34 8.13,29.34 | IC10.6 6.73,21.88

## Text on the board
Top: 1
Route2: 2
Route15: 3
Bottom: 4
tPlace: Made in Finland / by AOD Electronics / Hw. rev. 1.0